# Altium PCB FT232R-Breakout_v37.PcbDoc
Units mil, origin at the board's own origin, x right, y up, seen from the top; angles counter-clockwise.
Board outline 1200 x 800 mil, 2 copper layers (Top, Bottom); 20 components, 22 nets, 83 pads, 19 vias.
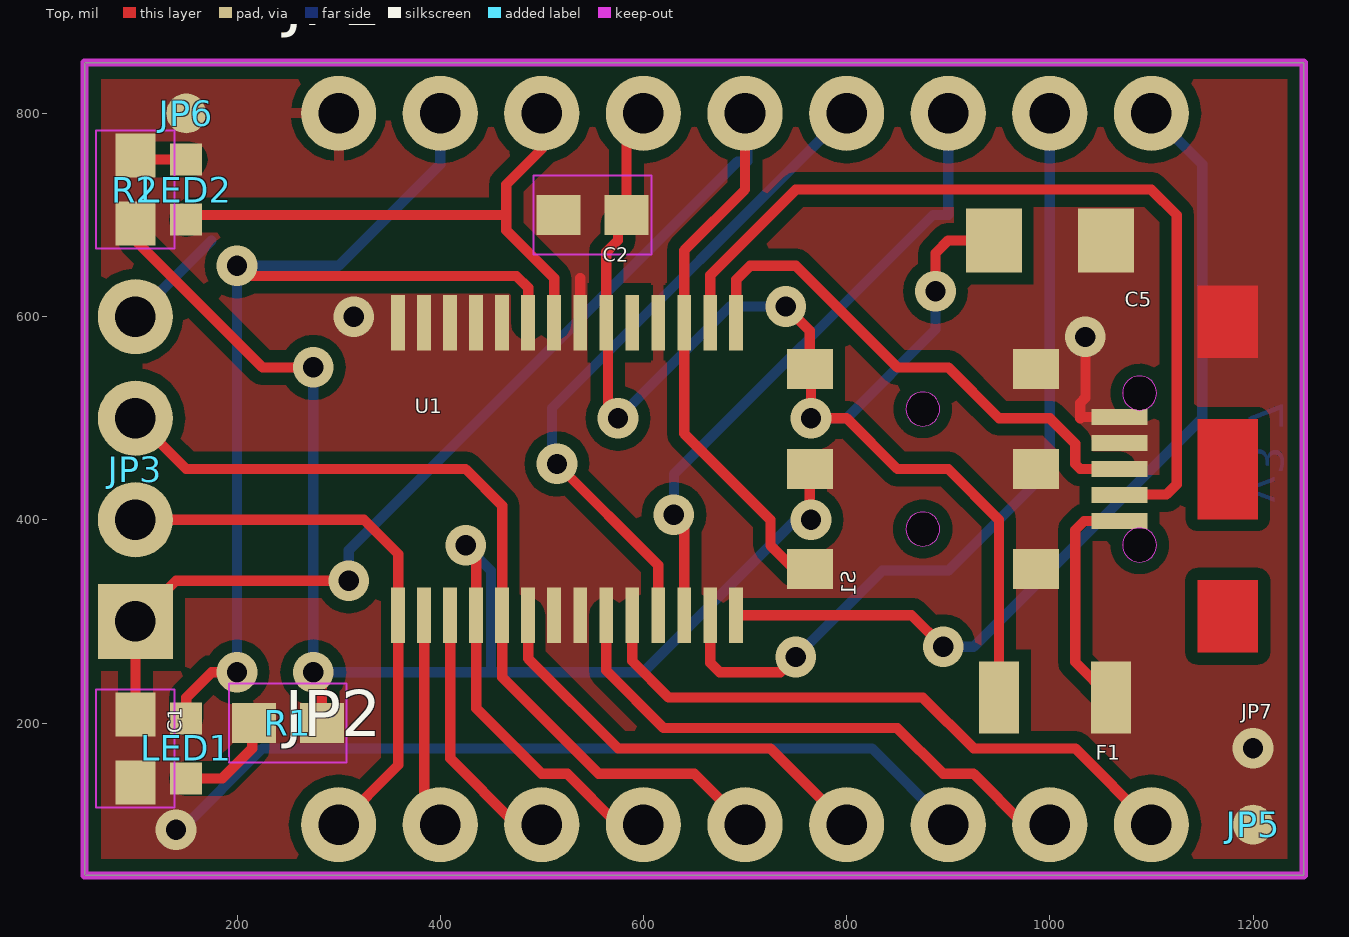
[diagram p0: Top view]
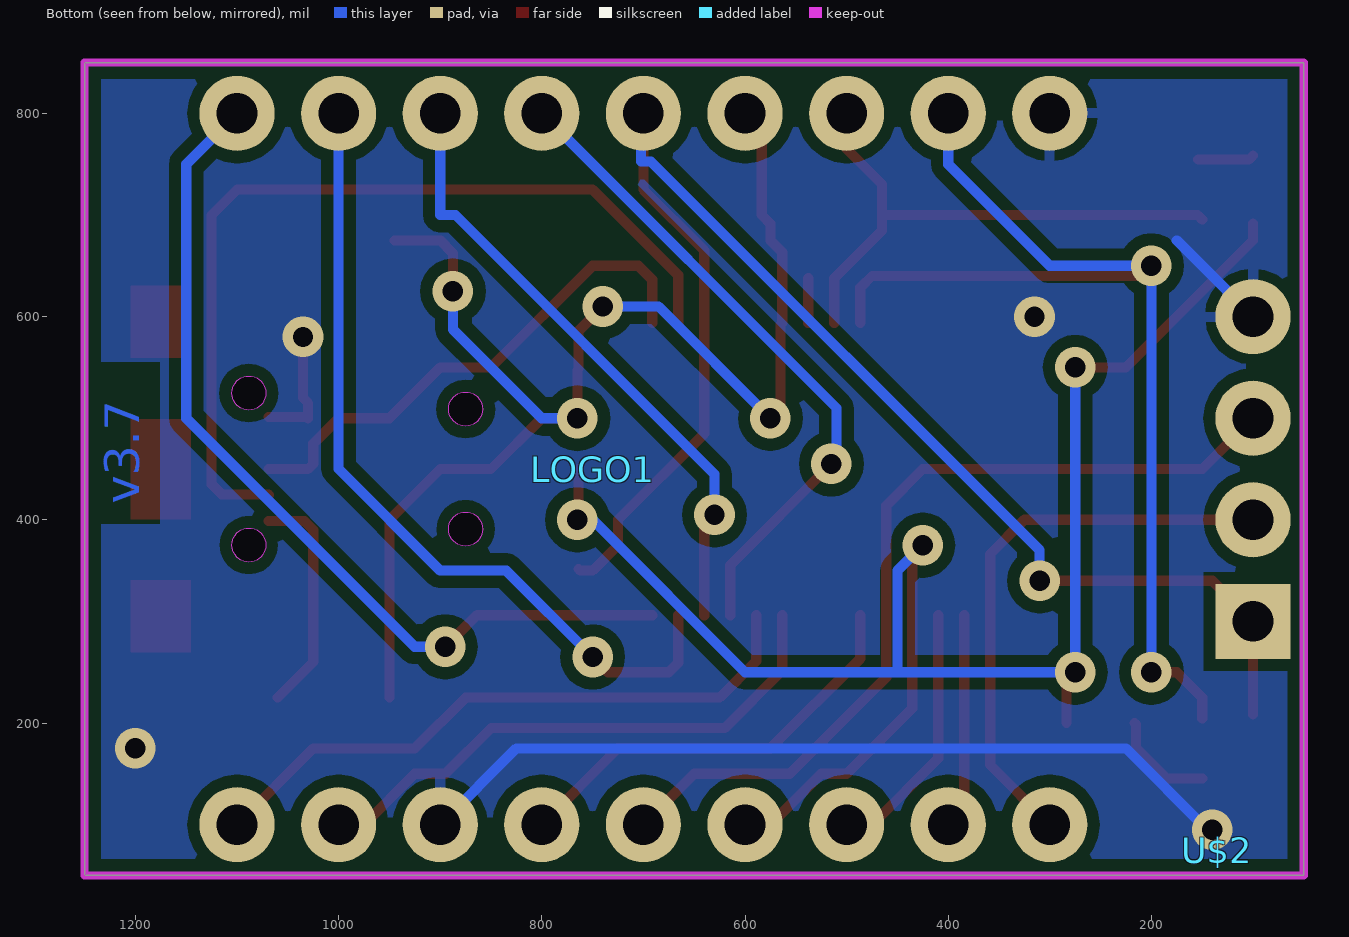
[diagram p1: Bottom view, seen from below]

## Layer stack, top to bottom
Top Solder: solder mask 0.4, Solder Resist, Dk 3.5
Top: signal copper 1.378
Dielectric 1: dielectric 12.6, FR-4, Dk 4.8
Bottom: signal copper 1.378
Bottom Solder: solder mask 0.4, Solder Resist, Dk 3.5

## Board outline
50,50 50,850 1250,850 1250,50
cut-out: 875,492.33 ccw(c875,509.06) 891.73,509.06 ccw(c875,509.06) 875,525.79 ccw(c875,509.06) 858.27,509.06 ccw(c875,509.06)
cut-out: 875,374.21 ccw(c875,390.94) 891.73,390.94 ccw(c875,390.94) 875,407.67 ccw(c875,390.94) 858.27,390.94 ccw(c875,390.94)
cut-out: 1088.39,358.47 ccw(c1088.39,375.2) 1105.12,375.2 ccw(c1088.39,375.2) 1088.39,391.93 ccw(c1088.39,375.2) 1071.66,375.2 ccw(c1088.39,375.2)
cut-out: 1088.39,508.07 ccw(c1088.39,524.8) 1105.12,524.8 ccw(c1088.39,524.8) 1088.39,541.53 ccw(c1088.39,524.8) 1071.66,524.8 ccw(c1088.39,524.8)

## Design rules (kind name [scope] priority, off if disabled: settings)
BoardOutlineClearance mdCopperDimension [All] p1: gap=10 ignorepadtopadclearanceinfootprint=FALSE except(0: Arc-SplitContinuation Track-SplitContinuation SMDPad-SplitContinuation THPad-SplitContinuation Via-SplitContinuation Fill-SplitContinuation Poly-SplitContinuation Region-SplitContinuation Text-SplitContinuation)
Clearance Clearance_for_PolygonClass_Isolate_12 [InPolygonClass('Isolate_12') vs IsArc Or IsTrack Or IsPad Or IsVia Or IsFill Or IsRegion Or IsText] p1: gap=12 ignorepadtopadclearanceinfootprint=FALSE
Clearance "Clearance (Same Net)" [All] p2: gap=8 ignorepadtopadclearanceinfootprint=FALSE
Clearance [All] p3: gap=8 ignorepadtopadclearanceinfootprint=FALSE
HoleSize HoleSize_For_NetClass_power [InNetClass('power')] p1: absolutevalues=TRUE maxlimit=0 minlimit=0 maxpercent=80.000 minpercent=20.000
HoleSize [All] p2: absolutevalues=TRUE maxlimit=100000 minlimit=20 maxpercent=80.000 minpercent=20.000
HoleToHoleClearance mdDrill [All] p1: gap=8 allowstackedmicrovias=TRUE
MinimumSolderMaskSliver [All] p1 off: minsoldermaskwidth=10
PasteMaskExpansion Expansion_SMDPaste_OFF [InPadClass('SMDPaste_OFF')] p1: expansion=0
PasteMaskExpansion mlMinCreamFrame [All] p2: expansion=0
PolygonConnect PolygonConnect_For_PolygonThermal_ON_Width100000_Gap100000 [InPolygonClass('PolygonThermal_ON_Width100000_Gap100000') vs Not IsVia] p1: connectstyle=Relief reliefconductorwidth=10 reliefentries=4 polygonreliefangle="90 Angle" airgapwidth=10
PolygonConnect ThermalVias [IsVia] p2: connectstyle=Direct reliefconductorwidth=10 reliefentries=4 polygonreliefangle="90 Angle" airgapwidth=10
PolygonConnect [All] p3: connectstyle=Relief reliefconductorwidth=10 reliefentries=4 polygonreliefangle="90 Angle" airgapwidth=10
RoutingVias [All] p1: holewidth=20 width=40 viastyle="Through Hole" minholewidth=20 minwidth=40 maxholewidth=100 maxwidth=100
SolderMaskExpansion mlMinStopFrame [All] p1: expansion=4 istentingtop=FALSE
Width Width_For_NetClass_power [InNetClass('power')] p1: maxlimit=10 minlimit=10 preferedwidth=10
Width [All] p2: maxlimit=10000 minlimit=8 preferedwidth=8
26 further rules are at their usual default settings.

## Classes and differential pairs
polygon class PolygonThermal_ON_Width100000_Gap100000: Polygon_1_Net_GND Polygon_2_Net_GND
polygon class Isolate_12: Polygon_1_Net_GND Polygon_2_Net_GND
pad class SMDPaste_OFF: JP5-1 JP6-1
net class power: 3.3V GND VCC

## Components (designator, comment, footprint, x,y, rotation, side; value= is the part's Value field where it differs from the comment)
C1 "0.1uF" 0603-CAP 100,175 r270 top
C2 "0.1uF" 0603-CAP 550,700 r180 top
C5 "10uF" EIA3216 1000,675 r180 top
F1 "500mA" PTC-1206 1005,225 r180 top
FRAME1 "" CREATIVE_COMMONS 115.4,-350 r0 top
JP1 "" 1X09 300,800 r0 top
JP2 "" 1X09 300,100 r0 top
JP3 "" 1X04 100,300 r90 top
JP5 "" FIDUCIAL-1X2 1200,100 r0 top
JP6 "" FIDUCIAL-1X2 150,800 r0 top
JP7 "USB_MICROB_PLUGCONN-11752" USB-B-MICRO-SMD_V03 1175,450 r180 top
LED1 "Red" LED-0603 150,175 r0 top
LED2 "Green" LED-0603 150,725 r180 top
LOGO1 "" OSHW-LOGO-S 750,450 r90 bottom
R1 "330" 0603-RES 250,200 r0 top
R2 "330" 0603-RES 100,725 r270 top
S1 "" AYZ0202 875,450 r90 top
U1 "FT232R" SSOP28DB 525,450 r0 top
U$1 "" REVISION 550,-450 r0 top
U$2 "" SFE-NEW-WEBLOGO 135,75 r90 bottom

## Footprints (in the part's own frame and the unit in brackets; to place one, negate y for a bottom-side part, rotate by r counter-clockwise, add the part's x,y. Pads: shape width x height; smd on the part's side, far side on the other; paste and mask are expansions set on the pad)
1X04 [mil] "1X04"
  rect 74x74 / inner round 68.37 / far side rect 74x74 hole 40: 1(0,0)
  round 74 hole 40: 2(100,0) 3(200,0) 4(300,0)
1X09 [mil] "1X09"
  round 74 hole 40: 1(0,0) 2(100,0) 3(200,0) 4(300,0) 5(400,0) 6(500,0) 7(600,0) 8(700,0) 9(800,0)
0603-CAP [mm] "0603-CAP"
  rect 1.1x1 smd: 1(-0.85,0) 2(0.85,0)
  Top keep-out lines w0.051: 1.473,-0.983 -1.473,-0.983 -1.473,0.983 1.473,0.983 1.473,-0.983
0603-RES [mm] "0603-RES"
  rect 1.1x1 smd: 1(-0.85,0) 2(0.85,0)
  Top keep-out lines w0.051: -1.473,-0.983 -1.473,0.983 1.473,0.983 1.473,-0.983 -1.473,-0.983
AYZ0202 [mm] "AYZ0202"
  rect 1x1.15 smd: 1(-2.5,2.825) 2(0,2.825) 3(2.5,2.825) 4(-2.5,-2.825) 5(0,-2.825) 6(2.5,-2.825)
CREATIVE_COMMONS [mil] "CREATIVE_COMMONS"
EIA3216 [mil] "EIA3216"
  rect 55.12x62.99 smd: A(55.12,0) C(-55.12,0)
FIDUCIAL-1X2 [mm] "FIDUCIAL-1X2"
  rrect100% 1x1 smd paste+0: 1(0,0)
LED-0603 [mil] "LED-0603"
  rect 31.5x31.5 smd: A(0,-29.53) C(0,29.53)
OSHW-LOGO-S [mil] "OSHW-LOGO-S"
PTC-1206 [mm] "PTC-1206"
  rect 1x1.8 smd: 1(-1.4,0) 2(1.4,0)
REVISION [mil] "REVISION"
SFE-NEW-WEBLOGO [mil] "SFE-NEW-WEBLOGO"
SSOP28DB [mil] "SSOP28DB"
  rect 13.7x55 smd: 1(-166.34,-143.94) 2(-140.75,-143.94) 3(-115.16,-143.94) 4(-89.57,-143.94) 5(-63.98,-143.94) 6(-38.39,-143.94) 7(-12.8,-143.94) 8(12.8,-143.94) 9(38.39,-143.94) 10(63.98,-143.94) 11(89.57,-143.94) 12(115.16,-143.94) 13(140.75,-143.94) 14(166.34,-143.94) 15(166.34,143.94) 16(140.75,143.94) 17(115.16,143.94) 18(89.57,143.94) 19(63.98,143.94) 20(38.39,143.94) 21(12.8,143.94) 22(-12.8,143.94) 23(-38.39,143.94) 24(-63.98,143.94) 25(-89.57,143.94) 26(-115.16,143.94) 27(-140.75,143.94) 28(-166.34,143.94)
USB-B-MICRO-SMD_V03 [mm] "USB-B-MICRO-SMD_V03"
  rect 1.4x0.4 smd: D+1(2.7,0) D-1(2.7,0.65) GND1(2.7,-1.3) ID1(2.7,-0.65) VBUS1(2.7,1.3)
  Top region: -0.75,-4.584 -0.75,-2.784 0.75,-2.784 0.75,-4.584
  Top region: -0.75,-1.25 -0.75,1.25 0.75,1.25 0.75,-1.25
  Top region: -0.75,2.784 -0.75,4.584 0.75,4.584 0.75,2.784

## Part data
C1 C2: library part 0603-CAP, PackageName=0603-CAP
C5: library part EIA3216, PackageName=EIA3216
F1: library part PTC-1206, PackageName=PTC-1206
FRAME1: library part CREATIVE_COMMONS, PackageName=CREATIVE_COMMONS
JP1 JP2: library part 1X09, PackageName=1X09
JP3: library part 1X04, PackageName=1X04
JP5 JP6: library part FIDUCIAL-1X2, PackageName=FIDUCIAL-1X2
JP7: library part USB-B-MICRO-SMD_V03, PackageName=USB-B-MICRO-SMD_V03
LED1 LED2: library part LED-0603, PackageName=LED-0603
LOGO1: library part OSHW-LOGO-S, PackageName=OSHW-LOGO-S
R1 R2: library part 0603-RES, PackageName=0603-RES
S1: library part AYZ0202, PackageName=AYZ0202
U1: library part SSOP28DB, PackageName=SSOP28DB
U$1: library part REVISION, PackageName=REVISION
U$2: library part SFE-NEW-WEBLOGO, PackageName=SFE-NEW-WEBLOGO

## Free pads (board coordinates)
  round 33.46 hole 33.46 unplated: MH1(875,509.06) MH1(1088.39,375.2) MH2(875,390.94) MH2(1088.39,524.8)

## Via types
v1: diameter 40/40 (per signal layer), hole 20, Top to Bottom, 19 vias

## Nets (pads, with @x,y where several pads share a name; then routed paths per layer and width w, separated by ;. In a path a pad name is that pad's centre, name@x,y a point inside that pad or via, vN(x,y) a via of type N, cw(c..) or ccw(c..) an arc to the next point about the centre after c; other vN are vias at no path point)
3.3V: C1.1 JP1.5 JP3.1 S1.1 U1.17 | length 1489.4
  Top w10: C1.1 JP3.1 ; JP3.1@105,305 JP3.1 ; v1(310,340) 140,340 JP3.1 ; JP1.5 700,725 640.16,665.16 U1.17 640.16,484.84 725,400 725,375 750,350 762.2,350 S1.1
  Bottom w10: v1(310,340) 310,370 692.5,752.5 702.5,752.5 702.5,797.5 JP1.5
CTS: JP1.6 U1.11 | length 657.4
  Top w10: v1(515,455) 614.57,355.43 U1.11
  Bottom w10: v1(515,455) 510,460 510,510 JP1.6
DCD: JP2.9 U1.10 | length 622.8
  Top w10: U1.10 588.98,261.02 625,225 875,225 925,175 1025,175 JP2.9
DSR: JP2.8 U1.9 | length 553.9
  Top w10: U1.9 563.39,251.61 620,195 850,195 895,150 925,150 975,100 JP2.8
DTR: JP2.2 U1.2 | length 212.6
  Top w10: U1.2 384.25,115.75 JP2.2
GND: C1.2 C2.2 C5.C JP1.1 JP2.7 JP3.4 JP7.GND1 U1.7 U1.18 U1.21 U1.25 U1.26 | length 1110
  Top w10: U1.21 537.8,637.8 ; v1(1035,580) 1035,520 1030,515 1030,500 1031.18,501.18 JP7.GND1
  Bottom w10: JP3.4 125,600 125,625 175,675 ; v1(140,95) 145,95 225,175 825,175 JP2.7
  other v1: 1200,175 315,600
N$1: LED1.A R1.1 | length 102.9
  Top w10: LED1.A 185.47,145.47 215,175 215,198.46 R1.1
N$2: LED2.A R2.1 | length 55.6
  Top w10: R2.1 103.94,754.53 LED2.A LED2.A@153.94,754.53
N$3: F1.1 JP7.VBUS1 | length 226.9
  Top w10: F1.1 1025,260.12 1025,390 1033.82,398.82 JP7.VBUS1
PWREN: JP1.9 U1.14 | length 885.4
  Top w10: U1.14 863.94,306.06 v1(895,275)
  Bottom w10: v1(895,275) 925,275 1150,500 1150,750 JP1.9
RI: JP2.6 U1.6 | length 428.7
  Top w10: U1.6 486.61,263.39 575,175 725,175 JP2.6 JP2.6@800,105
RTS: JP2.3 U1.3 | length 258.1
  Top w10: U1.3 409.84,165.16 475,100 JP2.3
RXD: JP2.5 JP3.3 U1.5 | length 864.7
  Top w10: JP3.3 150,450 425,450 461.02,413.98 U1.5 461.02,245 556.02,150 650,150 JP2.5
RXLED: JP1.3 LED2.C U1.22 | length 557
  Top w10: LED2.C 154.53,700 465,700 ; JP1.3 500,765 465,730 465,700 ; U1.22 512.2,637.8 465,685 465,700
SLEEP: JP1.7 U1.12 | length 618.8
  Top w10: v1(630,405) 640.16,394.84 U1.12
  Bottom w10: v1(630,405) 630,445 885,700 900,700 JP1.7
TXD: JP2.1 JP3.2 U1.1 | length 563.2
  Top w10: JP3.2 325,400 358.66,366.34 U1.1 358.66,158.66 JP2.1
TXDEN: JP1.8 U1.13 | length 817.7
  Top w10: U1.13 665.75,259.25 675,250 735,250 v1(750,265)
  Bottom w10: v1(750,265) 835,350 900,350 1000,450 JP1.8
TXLED: JP1.2 LED1.C U1.23 | length 1102.3
  Top w10: LED1.C 150,225 175,250 v1(200,250) ; v1(200,650) 210,640 475,640 486.61,628.39 U1.23
  Bottom w10: v1(200,250) v1(200,650) 300,650 400,750 JP1.2
USB_D+: JP7.D+1 U1.15 | length 520
  Top w10: U1.15 691.34,636.34 705,650 750,650 850,550 900,550 950,500 1000,500 1025,475 1025,455 1030,450 JP7.D+1
USB_D-: JP7.D-1 U1.16 | length 877
  Top w10: U1.16 665.75,640.75 750,725 1100,725 1125,700 1125,435 1115,425 1069.29,425 JP7.D-1
VCC: C2.1 C5.A F1.2 JP1.4 S1.3 U1.20 | length 1348.7
  Top w10: v1(575,500) 565,510 565,592.32 U1.20 563.39,663.39 575,675 575,691.54 C2.1 583.46,783.46 JP1.4 ; v1(740,610) 763.78,586.22 S1.3 765,547.2 v1(765,500) 800,500 850,450 900,450 949.88,400.12 F1.2 F1.2@950,225 ; v1(887.5,625) 887.5,662.5 900,675 C5.A
  Bottom w10: v1(575,500) 685,610 v1(740,610) ; v1(765,500) 800,500 887.5,587.5 v1(887.5,625)
VCCIO: JP2.4 R1.2 R2.2 S1.2 U1.4 | length 1716.5
  Top w10: R2.2 100,675 225,550 v1(275,550) ; v1(275,250) 283.46,250 R1.2 ; v1(425,375) 435.43,364.57 U1.4 435.43,214.57 500,150 525,150 575,100 JP2.4 ; S1.2 763.78,401.22 v1(765,400)
  Bottom w10: v1(275,550) v1(275,250) 450,250 ; v1(425,375) 450,350 450,250 ; v1(765,400) 750,400 600,250 450,250
pads on no net: JP5.1 JP6.1 JP7.ID1 S1.4 S1.5 S1.6 U1.8 U1.19 U1.24 U1.27 U1.28

## Polygon pours and split planes (outlines as drawn)
GND on Bottom "Polygon_1_Net_GND" (solid, remove dead copper, pour order 1): 45,45 45,855 1255,855 1255,45
GND on Top "Polygon_2_Net_GND" (solid, remove dead copper, pour order 0): 45,45 45,855 1255,855 1255,45

## Keep-outs
Keep-Out Layer:
  the board outline again, w8

## Other copper
Bottom:
  text "v3.7" at 1196.01,416.04 h34 r270

## Silkscreen, mask and mechanical layers (free items; w line width, h text height)
Dimension:
  the board outline again, w8
tDocu:
  text "Nathan Seidle" at 1200,-350 h59.5
  text "Toni Klopfenstein" at 1150,-450 h59.5
tPlace:
  text "RX" at 190,730 h27.2
  text "VCC" at 782.5,605 h27.2
  text "GND" at 180,580 h27.2
  text "RX-I" at 180,480 h27.2
  text "TX-O" at 180,380 h27.2
  text "3.3V" at 180,280 h27.2
  text "3.3V" at 782.5,242.5 h27.2
  text "FT232R Breakout" at 410,170 h34
  text "TX" at 195,130 h27.2
bPlace:
  text "GND" at 291.01,664.36 h34 r270
  text "VCC" at 591.01,664.36 h34 r270
  text "CTS" at 791.01,664.36 h34 r270
  text "V3.3" at 691.01,636.04 h34 r270
  text "TXLED" at 391.01,596.38 h34 r270
  text "RXLED" at 491.01,596.38 h34 r270
  text "SLEEP" at 891.01,596.38 h34 r270
  text "TXDEN" at 991.01,596.38 h34 r270
  text "PWREN" at 1091.01,596.38 h34 r270
  text "TXD" at 270,165 h34 r270
  text "DTR" at 375,165 h34 r270
  text "RTS" at 470,165 h34 r270
  text "VCCIO" at 570,165 h34 r270
  text "RXD" at 670,165 h34 r270
  text "RI" at 775,165 h34 r270
  text "GND" at 870,165 h34 r270
  text "DSR" at 970,165 h34 r270
  text "DCD" at 1070,165 h34 r270

## Text inside footprints (layer, text, board x,y; h text height)
FRAME1: tDocu "Designed by:" at 565.4,-350 h108.5; tDocu "http://creativecommons.org/licenses/by-sa/3.0" at 115.4,-250 h108.5; tDocu "Released under the Creative Commons Attribution Share-Alike 3.0 License" at -684.6,-150 h108.5
JP7: tDocu "PCB Front" at 1358.46,215.35 h18.6 r180
U$1: tDocu "Revision By:" at 550,-450 h108.5